# EAGLE board EMG_Shield_v.1.2 (EAGLE 6.2)
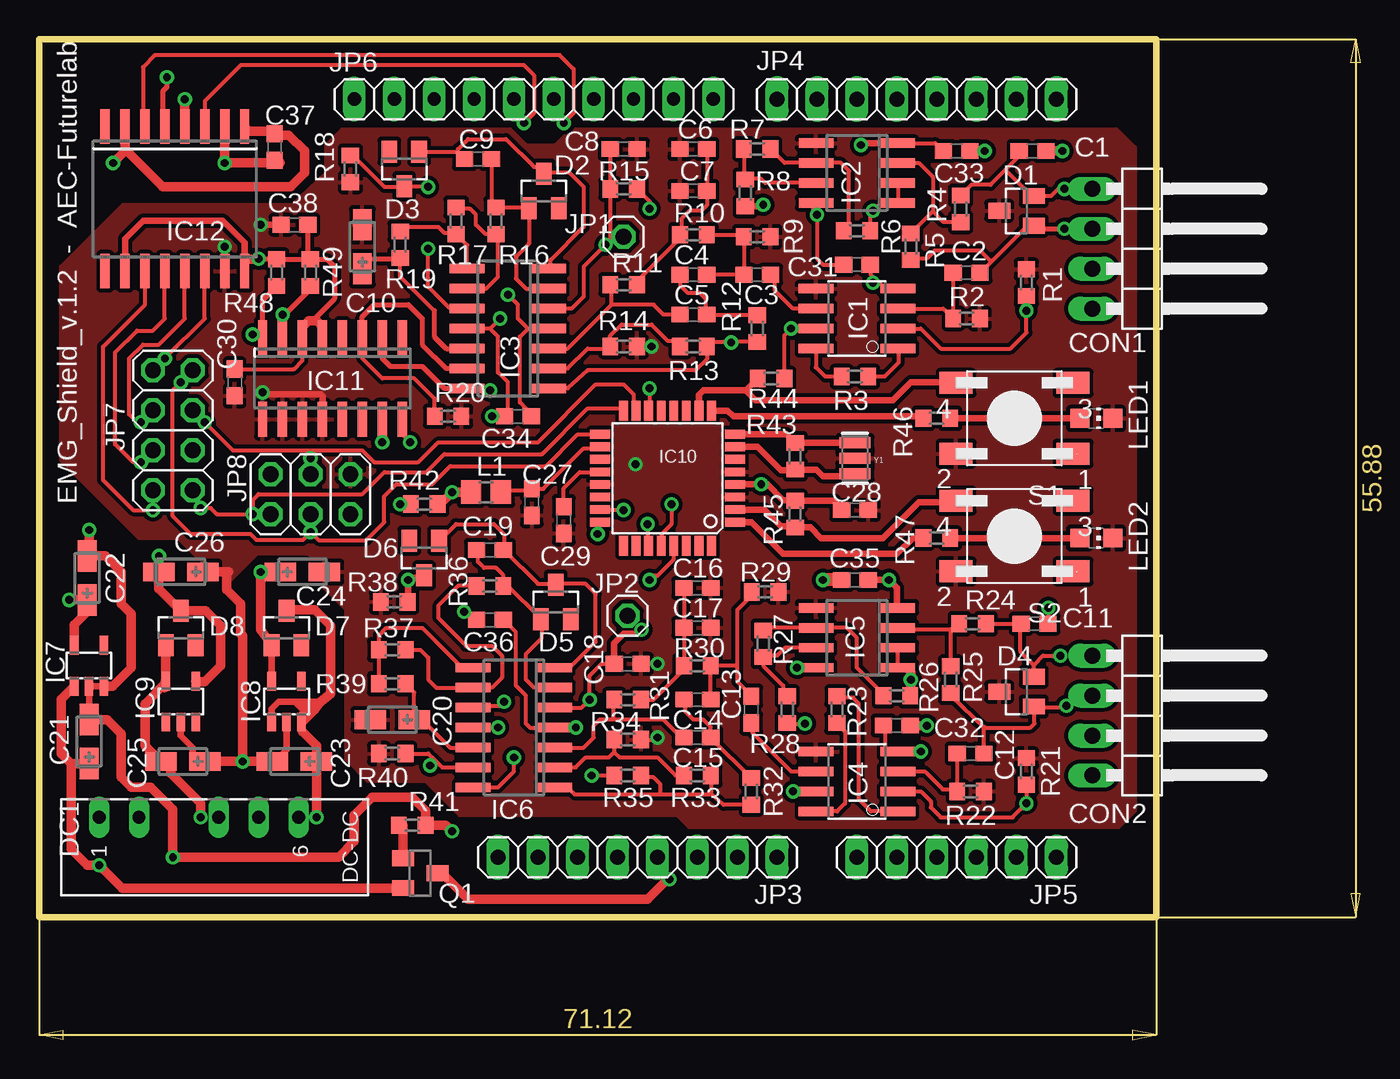
[diagram p0: board, top side]
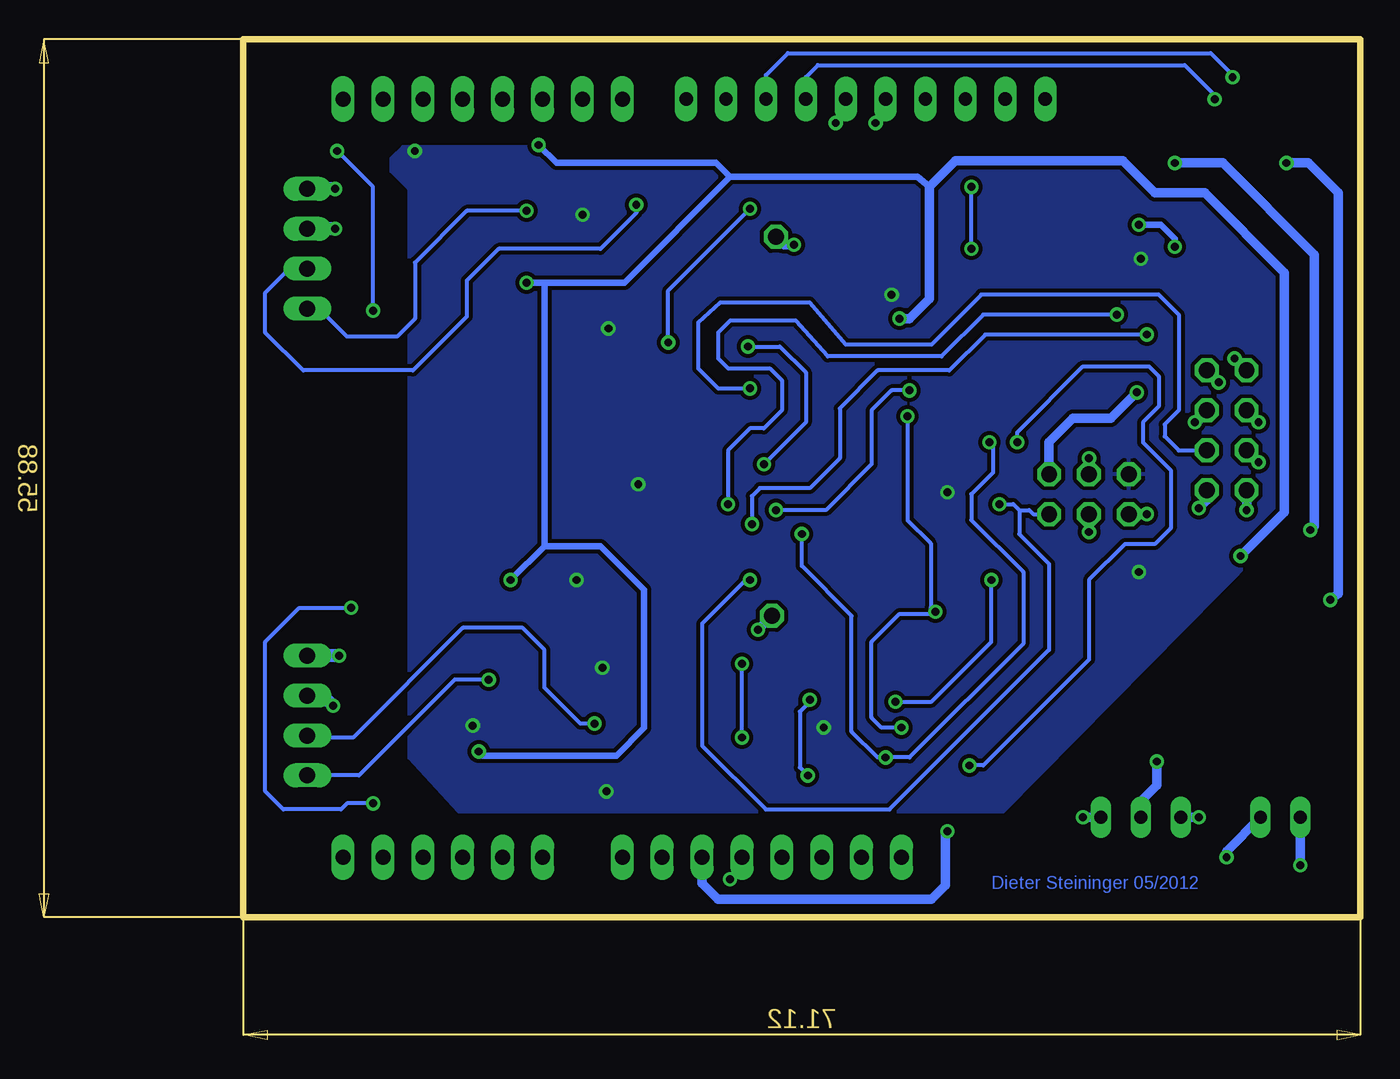
[diagram p1: board, bottom side, seen from below]

Size 71.12 x 55.88 mm. Coordinates in mm from the lower left corner, seen from the top.
Outline: 0,0 0,55.88 71.12,55.88 71.12,0 0,0
Copper layers (1*16): Top 0.035mm / dielectric 1.5mm / Bottom 0.035mm
Design rules: minimum track width 10mil, minimum drill 24mil, track to track 10mil, track to pad 10mil, pad to pad 10mil, via to via 10mil, smd to smd 8mil, copper to edge 40mil, drill to drill 8mil, minimum pad ring 10mil, minimum via ring 8mil, stop-mask expansion 4mil, vias tented up to drill 0mil, thermal gap 10mil

## Footprints (pad centres in the part's own frame; a part is rotated, then mirrored left to right if it is on the bottom)
C0603 = smd 1.1 x 1: 1 -0.85,0; 2 0.85,0
CT3216 = smd 2 x 1.2: + -1.4,0; - 1.4,0
1X04/90 = drill 1.016 long: 1 -3.81,-3.81; 2 -1.27,-3.81; 3 1.27,-3.81; 4 3.81,-3.81
SOT23 = smd 1 x 1.4: 1 -0.95,-1.1; 2 0.95,-1.1; 3 0,1.1
NMA = drill 0.813 long: 1 0,6.35; 2 0,3.81; 4 0,-1.27; 5 0,-3.81; 6 0,-6.35
SO08 = smd 0.61 x 2.21: 1 -1.905,-2.616; 2 -0.635,-2.616; 3 0.635,-2.616; 4 1.905,-2.616; 5 1.905,2.616; 6 0.635,2.616; 7 -0.635,2.616; 8 -1.905,2.616
SO08' = smd 0.6 x 2.2: 1 -1.905,-2.6; 2 -0.635,-2.6; 3 0.635,-2.6; 4 1.905,-2.6; 5 1.905,2.6; 6 0.635,2.6; 7 -0.635,2.6; 8 -1.905,2.6
SO14 = smd 0.6 x 2.2: 1 -3.81,-2.6; 2 -2.54,-2.6; 3 -1.27,-2.6; 4 0,-2.6; 5 1.27,-2.6; 6 2.54,-2.6; 7 3.81,-2.6; 8 3.81,2.6; 9 2.54,2.6; 10 1.27,2.6; 11 0,2.6; 12 -1.27,2.6; 13 -2.54,2.6; 14 -3.81,2.6
SOT23-DBV = smd 0.55 x 1.2: 1 -0.95,-1.3; 2 0,-1.3; 3 0.95,-1.3; 4 0.95,1.3; 5 -0.95,1.3
SOT23-5 = smd 0.55 x 1.2: 1 -0.95,-1.3; 2 0,-1.3; 3 0.95,-1.3; 4 0.95,1.3; 5 -0.95,1.3
TQFP32-08 = smd 1.27 x 0.559: 1 -4.293,2.8; 2 -4.293,2; 3 -4.293,1.2; 4 -4.293,0.4; 5 -4.293,-0.4; 6 -4.293,-1.2; 7 -4.293,-2; 8 -4.293,-2.8; 17 4.293,-2.8; 18 4.293,-2; 19 4.293,-1.2; 20 4.293,-0.4; 21 4.293,0.4; 22 4.293,1.2; 23 4.293,2; 24 4.293,2.8 | smd 0.559 x 1.27: 9 -2.8,-4.293; 10 -2,-4.293; 11 -1.2,-4.293; 12 -0.4,-4.293; 13 0.4,-4.293; 14 1.2,-4.293; 15 2,-4.293; 16 2.8,-4.293; 25 2.8,4.293; 26 2,4.293; 27 1.2,4.293; 28 0.4,4.293; 29 -0.4,4.293; 30 -1.2,4.293; 31 -2,4.293; 32 -2.8,4.293
SOIC16N = smd 0.6 x 2.2: 1 -4.445,-2.6; 2 -3.175,-2.6; 3 -1.905,-2.6; 4 -0.635,-2.6; 5 0.635,-2.6; 6 1.905,-2.6; 7 3.175,-2.6; 8 4.445,-2.6; 9 4.445,2.6; 10 3.175,2.6; 11 1.905,2.6; 12 0.635,2.6; 13 -0.635,2.6; 14 -1.905,2.6; 15 -3.175,2.6; 16 -4.445,2.6
SO-16DW = smd 0.6 x 2.2: 1 -4.445,-4.6; 2 -3.175,-4.6; 3 -1.905,-4.6; 4 -0.635,-4.6; 5 0.635,-4.6; 6 1.905,-4.6; 7 3.175,-4.6; 8 4.445,-4.6; 9 4.445,4.6; 10 3.175,4.6; 11 1.905,4.6; 12 0.635,4.6; 13 -0.635,4.6; 14 -1.905,4.6; 15 -3.175,4.6; 16 -4.445,4.6
1X01 = drill 1.016 octagon: 1 0,0
SMARTPRJ_1X08-TH = drill 0.95 pad 1.422 long: 1 -8.89,0; 2 -6.35,0; 3 -3.81,0; 4 -1.27,0; 5 1.27,0; 6 3.81,0; 7 6.35,0; 8 8.89,0
SMARTPRJ_1X06-TH = drill 0.95 pad 1.422 long: 1 -6.35,0; 2 -3.81,0; 3 -1.27,0; 4 1.27,0; 5 3.81,0; 6 6.35,0
SMARTPRJ_1X10 = drill 0.85 pad 1.422 long: 1 -11.43,0; 2 -8.89,0; 3 -6.35,0; 4 -3.81,0; 5 -1.27,0; 6 1.27,0; 7 3.81,0; 8 6.35,0; 9 8.89,0; 10 11.43,0
2X04 = drill 1.016 octagon: 1 -3.81,-1.27; 2 -3.81,1.27; 3 -1.27,-1.27; 4 -1.27,1.27; 5 1.27,-1.27; 6 1.27,1.27; 7 3.81,-1.27; 8 3.81,1.27
2X03 = drill 1.016 octagon: 1 -2.54,-1.27; 2 -2.54,1.27; 3 0,-1.27; 4 0,1.27; 5 2.54,-1.27; 6 2.54,1.27
R0805 = smd 1.3 x 1.5: 1 -0.95,0; 2 0.95,0
CHIP-LED0805 = smd 1.2 x 1.2: A 0,-1.05; C 0,1.05
R0603 = smd 1 x 1.1: 1 -0.85,0; 2 0.85,0
TASTER-9314_SMD = smd 2.1 x 1.4: 1 -3.73,2.25; 2 3.73,2.25; 3 -3.73,-2.25; 4 3.73,-2.25
SMARTPRJ_RESONATOR = smd 0.7 x 2: 1 -1,0; 2 0,0; 3 1,0

## Placement (x,y rotation side)
C1  68nF  [C0603]  63.25,48.77 0 top
C2  68nF  [C0603]  59.05,41.02 180 top
C3  68nF  [C0603]  45.72,40.89 180 top
C4  150nF  [C0603]  41.66,40.89 180 top
C5  150nF  [C0603]  41.66,38.35 180 top
C6  150nF  [C0603]  41.66,48.9 0 top
C7  150nF  [C0603]  41.66,46.23 0 top
C8  68nF  [C0603]  37.21,48.9 180 top
C9  47pF  [C0603]  27.94,48.26 180 top
C10  4,7µF  [CT3216]  20.57,42.67 90 top
C11  68nF  [C0603]  63.37,18.67 0 top
C12  68nF  [C0603]  59.31,10.41 180 top
C13  68nF  [C0603]  45.34,13.21 90 top
C14  150nF  [C0603]  41.91,13.84 180 top
C15  150nF  [C0603]  41.91,11.43 180 top
C16  150nF  [C0603]  41.91,20.95 180 top
C17  150nF  [C0603]  41.91,18.41 180 top
C18  68nF  [C0603]  37.47,16.13 180 top
C19  47pF  [C0603]  28.7,23.37 0 top
C20  4,7µF  [CT3216]  22.48,12.57 180 top
C21  1µF  [CT3216]  3.17,11.18 90 top
C22  4,7µF  [CT3216]  3.05,21.59 90 top
C23  1µF  [CT3216]  16.26,9.91 180 top
C24  2,2µF  [CT3216]  16.76,21.97 0 top
C25  1µF  [CT3216]  9.14,9.91 180 top
C26  2,2µF  [CT3216]  9.02,21.97 180 top
C27  100nF  [C0603]  31.37,26.42 270 top
C28  100nF  [C0603]  51.94,25.91 0 top
C29  100nF  [C0603]  33.4,25.27 270 top
C30  100nF  [C0603]  12.45,34.04 270 top
C31  100nF  [C0603]  52.07,41.53 0 top
C32  100nF  [C0603]  54.61,12.19 180 top
C33  100nF  [C0603]  58.42,48.77 180 top
C34  100nF  [C0603]  30.48,31.88 180 top
C35  100nF  [C0603]  51.94,21.46 0 top
C36  100nF  [C0603]  28.7,18.92 180 top
C37  100nF  [C0603]  14.99,49.02 270 top
C38  100nF  [C0603]  16.26,44.07 180 top
CON1  Anschlusssockel  [1X04/90]  70.87,42.55 270 top
CON2  Anschlusssockel  [1X04/90]  70.87,12.83 270 top
D1  PESD24VL2BT,215  [SOT23]  62.23,44.96 90 top
D2  BAT54  [SOT23]  32.13,46.23 0 top
D3  BAT54  [SOT23]  23.24,47.62 180 top
D4  PESD24VL2BT,215  [SOT23]  62.23,14.35 90 top
D5  BAT54  [SOT23]  32.89,20.07 0 top
D6  BAT54  [SOT23]  24.51,22.86 180 top
D7  BAT54  [SOT23]  15.75,18.41 0 top
D8  BAT54  [SOT23]  9.02,18.41 0 top
DC1  MEA1D0505SC  [NMA]  10.16,6.35 90 top
IC1  INA118U  [SO08]  52.07,38.1 90 top
IC2  TLV272CDRG4  [SO08']  52.07,47.37 90 top
IC3  TLV274IDG4  [SO14]  29.84,37.47 90 top
IC4  INA118U  [SO08]  52.07,8.64 90 top
IC5  TLV272CDRG4  [SO08']  52.07,17.78 90 top
IC6  TLV274IDG4  [SO14]  30.23,12.06 90 top
IC7  TPS77033DBVRG4  [SOT23-DBV]  3.17,16 0 top
IC8  MIC5235  [SOT23-5]  15.75,13.72 0 top
IC9  MIC5270  [SOT23-5]  9.02,13.72 0 top
IC10  ATMEGA328P-AU  [TQFP32-08]  40.01,27.94 180 top
IC11  AD5242BRZ1M  [SOIC16N]  18.67,34.29 180 top
IC12  ISO7241  [SO-16DW]  8.64,45.72 180 top
JP1  Lötstift  [1X01]  37.21,43.31 0 top
JP2  Lötstift  [1X01]  37.47,19.18 0 top
JP3  Buchsenleiste  [SMARTPRJ_1X08-TH]  38.1,3.81 0 top
JP4  Buchsenleiste  [SMARTPRJ_1X08-TH]  55.88,52.07 0 top
JP5  Buchsenleiste  [SMARTPRJ_1X06-TH]  58.42,3.81 0 top
JP6  Buchsenleiste  [SMARTPRJ_1X10]  31.5,52.07 180 top
JP7  Trennleiste  [2X04]  8.51,30.99 270 top
JP8  Stiftleiste  [2X03]  17.27,26.92 0 top
L1  10µH  [R0805]  28.45,27.05 0 top
LED1  rot  [CHIP-LED0805]  67.31,31.75 270 top
LED2  rot  [CHIP-LED0805]  67.31,24.13 270 top
Q1  ZXMP3A13FTA  [SOT23]  24.26,2.79 270 top
R1  51k  [R0603]  62.87,40.39 270 top
R2  51k  [R0603]  59.05,38.1 0 top
R3  47R  [R0603]  51.94,34.42 180 top
R4  100k  [R0603]  58.67,45.09 90 top
R5  100k  [R0603]  55.5,42.67 270 top
R6  10k  [R0603]  52.07,43.69 180 top
R7  390k  [R0603]  45.72,48.9 180 top
R8  390k  [R0603]  44.96,46.1 270 top
R9  51k  [R0603]  45.72,43.31 180 top
R10  21k  [R0603]  41.66,43.43 0 top
R11  21k  [R0603]  37.21,40.26 0 top
R12  11k  [R0603]  45.72,37.47 90 top
R13  82k  [R0603]  41.66,36.32 180 top
R14  100k  [R0603]  37.21,36.32 0 top
R15  8k2  [R0603]  37.21,46.35 180 top
R16  27k  [R0603]  29.08,44.32 270 top
R17  27k  [R0603]  26.54,44.32 270 top
R18  27k  [R0603]  19.81,47.62 90 top
R19  47k  [R0603]  22.99,42.8 90 top
R20  6k8  [R0603]  26.04,31.88 0 top
R21  51k  [R0603]  62.87,9.27 270 top
R22  51k  [R0603]  59.31,8 0 top
R23  47R  [R0603]  50.8,13.21 270 top
R24  100k  [R0603]  59.44,18.67 0 top
R25  100k  [R0603]  58.04,15.11 270 top
R26  10k  [R0603]  54.61,14.1 180 top
R27  390k  [R0603]  46.1,17.4 270 top
R28  390k  [R0603]  47.62,13.21 270 top
R29  51k  [R0603]  46.23,20.7 180 top
R30  21k  [R0603]  41.91,16 0 top
R31  21k  [R0603]  37.47,13.84 0 top
R32  11k  [R0603]  45.34,8 90 top
R33  82k  [R0603]  41.91,9.02 180 top
R34  100k  [R0603]  37.47,11.3 0 top
R35  8k2  [R0603]  37.47,9.02 180 top
R36  27k  [R0603]  28.7,21.08 180 top
R37  27k  [R0603]  22.48,17.02 180 top
R38  27k  [R0603]  22.61,20.07 0 top
R39  47k  [R0603]  22.48,14.86 180 top
R40  6k8  [R0603]  22.48,10.41 180 top
R41  1k  [R0603]  23.75,5.84 0 top
R42  10k  [R0603]  24.51,26.29 0 top
R43  1M  [R0603]  48.13,29.34 90 top
R44  10k  [R0603]  46.61,34.29 0 top
R45  10k  [R0603]  48.13,25.65 90 top
R46  470R  [R0603]  57.15,31.75 180 top
R47  470R  [R0603]  57.15,24.13 180 top
R48  10k  [R0603]  15.11,41.02 270 top
R49  10k  [R0603]  17.27,41.02 270 top
S1  [TASTER-9314_SMD]  62.1,31.75 180 top
S2  [TASTER-9314_SMD]  62.1,24.26 180 top
Y1  CSTCE8M00G55-R0  [SMARTPRJ_RESONATOR]  51.94,29.21 90 top

## Library data of the parts
C1-C8 C10-C18 C20-C26 L1 = rcl
C9 C19 C27-C38 R1-R49 = resistor
CON1 CON2 JP1 JP2 JP7 JP8 = pinhead
D1-D8 = diode
DC1 = dc-dc-converter; MF: C & D TECHNOLOGIES, INC; MPN: NMA0515SC; OC_FARNELL: 1021434; OC_NEWARK: 61K3064
IC1 IC4 = burr-brown; MF: TEXAS INSTRUMENTS; MPN: INA118U; OC_FARNELL: 1212404; OC_NEWARK: 04M6168
IC2 IC3 IC5 IC6 = linear
IC7 = texas; MF: TEXAS INSTRUMENTS; MPN: TPS77033DBVT; OC_FARNELL: 8461570; OC_NEWARK: 77C1187
IC8 IC9 = v-reg-micrel
IC10 = atmega8
IC11 = analog-devices
IC12 = texas; MPN: ISO7241CDW; OC_FARNELL: 1575372; OC_NEWARK: 73M3155
JP3-JP6 Y1 = arduino_Uno_Rev3-02-TH
LED1 LED2 = led
Q1 = transistor-small-signal
S1 S2 = Ergaenzung

## Nets
+3V3: C22.+ C37.1 IC7.5 IC12.1 IC12.7
+5V: C24.+ C28.1 C30.1 C31.1 C32.1 C33.1 C34.1 C35.1 C36.1 C38.1 D7.1 IC1.7 IC2.8 IC3.4 IC4.7 IC5.8 IC6.4 IC8.5 IC10.4 IC11.5 IC11.6 IC12.10 IC12.16 JP8.2 L1.1 R42.2 R44.2 R45.2 R48.1 R49.1
-5V: C26.- C31.2 C32.2 C33.2 C34.2 C35.2 C36.2 D8.3 IC1.4 IC2.4 IC3.11 IC4.4 IC5.4 IC6.11 IC9.4
AGND: C21.- C22.- C37.2 DC1.2 IC7.2 IC7.3 IC12.2 JP3.6 R41.2
DIGI-POT-1-A: IC3.14 IC10.23 IC11.2
DIGI-POT-1-W: IC3.13 IC11.3 R20.1
DIGI-POT-2-A: IC6.14 IC10.24 IC11.16
DIGI-POT-2-W: IC6.13 IC11.15 R40.1
GND: C6.1 C7.1 C8.1 C10.- C16.1 C17.1 C18.1 C20.- C23.- C24.- C25.+ C26.+ C27.2 C28.2 C29.2 C30.2 C38.2 D1.3 D4.3 DC1.5 IC1.5 IC2.5 IC4.5 IC5.5 IC8.2 IC9.2 IC10.3 IC10.5 IC10.21 IC11.9 IC11.10 IC11.11 IC11.12 IC12.15 JP8.6 LED1.C LED2.C R1.1 R2.2 R9.1 R14.2 R18.1 R20.2 R21.1 R22.2 R29.1 R34.2 R38.1 R40.2 S1.2 S2.2 Y1.2
GND1: IC12.8
GND2: IC12.9
N$1: C1.1 CON1.1 D1.2 R4.2
N$2: IC1.1 R3.1
N$3: C1.2 IC1.2 R1.2
N$4: CON1.4 IC2.1 IC2.2 R6.1
N$5: C2.2 IC1.3 R2.1
N$6: C2.1 CON1.2 D1.1 R5.2
N$7: IC2.6 R6.2 R7.1
N$8: IC2.3 R4.1 R5.1
N$9: IC2.7 R7.2 R8.1
N$10: CON1.3 R8.2
N$11: IC4.1 R23.1
N$12: IC10.14 JP7.6
N$13: IC1.8 R3.2
N$14: C11.1 CON2.1 D4.2 R24.2
N$15: C3.1 IC1.6
N$16: C3.2 C4.1 R9.2 R10.2
N$17: IC3.1 R12.1 R13.1 R15.1
N$18: C4.2 C5.1 R12.2
N$19: C5.2 IC3.3 R11.1
N$20: C6.2 C7.2 R10.1 R11.2
N$21: IC3.2 R13.2 R14.1
N$22: C11.2 IC4.2 R21.2
N$23: C8.2 IC3.5 JP1.1 R15.2
N$24: C9.2 D2.3 D3.1 IC3.7
N$25: D3.3 IC3.10 R18.2
N$26: C9.1 D2.1 IC3.6 R16.1
N$27: IC3.9 R16.2 R17.1
N$28: IC3.8 R17.2 R19.2
N$29: C10.+ IC3.12 R19.1
N$30: C21.+ DC1.1 IC7.1 Q1.2
N$31: C12.2 IC4.3 R22.1
N$32: C12.1 CON2.2 D4.1 R25.2
N$33: IC5.3 R24.1 R25.1
N$34: CON2.4 IC5.1 IC5.2 R26.1
N$35: IC5.6 R26.2 R27.1
N$36: IC5.7 R27.2 R28.1
N$37: CON2.3 R28.2
N$38: IC12.14 JP7.1
N$39: IC12.4 JP6.4
N$40: IC4.8 R23.2
N$41: IC12.13 JP7.3
N$42: C13.1 IC4.6
N$43: C13.2 C14.1 R29.2 R30.2
N$44: C14.2 C15.1 R32.2
N$45: C15.2 IC6.3 R31.1
N$46: C16.2 C17.2 R30.1 R31.2
N$47: IC6.1 R32.1 R33.1 R35.1
N$48: IC6.2 R33.2 R34.1
N$49: C18.2 IC6.5 JP2.1 R35.2
N$50: C19.2 D5.3 D6.1 IC6.7
N$51: D6.3 IC6.10 R38.2
N$52: C19.1 D5.1 IC6.6 R36.1
N$53: IC6.9 R36.2 R37.1
N$54: IC6.8 R37.2 R39.2
N$55: C20.+ IC6.12 R39.1
N$56: C23.+ D7.3 DC1.6 IC8.1 IC8.3
N$57: JP3.5 Q1.3
N$58: IC10.9 R46.2
N$59: C25.- D8.1 DC1.4 IC9.5
N$60: IC10.10 R44.1 S1.4
N$61: Q1.1 R41.1
N$62: IC10.2 R45.1 S2.4
N$63: LED1.A R46.1
N$64: IC10.1 R47.2
N$65: LED2.A R47.1
N$66: IC12.6 JP6.5
N$67: IC10.17 JP7.2 JP8.3
N$68: IC10.15 JP7.4 JP8.4
N$69: IC12.12 JP7.5
N$70: IC10.16 JP7.8 JP8.1
N$71: IC12.3 JP6.6
N$72: IC12.5 JP6.3
N$73: IC12.11 JP7.7
N$74: C27.1 IC10.18 L1.2
N$75: IC10.7 R43.1 Y1.1
N$76: IC10.8 R43.2 Y1.3
N$83: C29.1 IC10.20
RESET: IC10.29 JP8.5 R42.1
SCL: IC10.28 IC11.7 R49.2
SDA: IC10.27 IC11.8 R48.2
VCC: IC10.6

## Tracks (layer width: path | path; a pad name or v marks a point on that pad's centre or on a via)
+3V3  (via drill 0.5 pad 0.25)
  Top 0.61: C22.+ 3.17,20.19 | 5.46,48.9 5.46,48.77 v4.7,48.01 | v1.91,20.19 3.17,20.19 C22.+ | IC12.7 5.46,48.9 | 5.46,48.9 7.87,46.48 16,46.48 16.89,47.37 16.89,48.77 15.88,49.78 15.58,49.78 C37.1 14.99,49.91 14.86,50.04 13.36,50.04 IC12.1 | IC7.5 2.23,18.61 3.05,19.43 C22.+
  Bottom 0.61: v4.7,48.01 3.3,48.01 1.4,46.1 1.4,20.57 v1.91,20.19
+5V  (via drill 0.5 pad 0.25, 0.5 pad 0.3)
  Top 0.254: IC6.4 31.24,12.06 30.99,12.32 30.99,14.1 30.35,14.73 30.35,18.12 C36.1 | R44.2 47.46,37.05 v47.88,37.47 | v49.53,44.7 49.53,41.91 49.91,41.53 C31.1 | 17.91,37.72 17.91,37.02 IC11.5 | 16.76,37.59 IC11.6 16.76,35.43 16.22,34.89 C30.1 | IC3.4 31.11,37.47 | 31.11,37.47 30.48,38.1 30.48,38.99 v29.84,39.62 | C34.1 31.08,31.92 31.08,32.3 30.61,32.77 30.61,36.96 31.11,37.47
  Top 0.305: C38.1 17.11,42.04 R49.1 | R49.1 R48.1 13.12,41.87 13.08,41.91 IC12.16 | R49.1 18.33,41.87 18.8,41.4 18.8,39.37 17.4,37.97 | 49.28,8 IC4.7
  Top 0.406: IC8.5 D7.1 | IC10.4 45.99,27.54 | C28.1 50.62,26.5 R45.2 48.09,26.54 47.37,26.54 46.37,27.54 45.99,27.54 | 45.99,27.54 v45.97,27.56 | v47.88,37.47 IC1.7 | IC12.10 5.46,43.18 6.6,44.32 11.68,44.32 13.08,42.93 13.08,41.91
  Top 0.61: IC6.4 v34.16,12.06 | IC5.8 v48.26,15.88 | C32.1 v56.52,12.19 | 49.28,8 v48.01,8 | IC2.8 49.47,44.76 v49.53,44.7 | C33.1 v60.2,48.77 | 16.76,37.59 17.14,37.97 17.4,37.97 17.65,37.97 17.91,37.72 | D7.1 14.8,17.33 14.1,18.29 v14.1,21.97 C24.+ | R42.2 25.53,26.29 v26.29,27.05 L1.1 | 13.12,41.87 13.93,41.87 v13.97,41.91
  Top 0.813: C35.1 v49.91,21.46
  pour Bottom: 4.32,41.27 12.32,49.02 60.96,49.02 61.72,48.26 61.72,47.5 60.58,46.35 60.58,10.16 57.4,6.73 22.73,6.73 4.32,25.4
-5V  (via drill 0.5 pad 0.25)
  Top 0.254: 54.69,10.72 IC4.4 54.69,10.67 53.85,10.67 53.85,12.1 C32.2 | IC2.4 57.06,49.28 C33.2 | IC1.4 53.85,40.01 53.21,40.64 | C31.2 52.96,41.49 52.96,40.89 53.21,40.64 | v28.83,31.88 C34.2 29.84,32.09 29.84,34.04 29.21,34.67 29.21,36.96 28.7,37.47 | 28.7,37.47 IC3.11 | 28.7,37.47 v29.34,38.1 | IC6.11 v29.21,12.06 | v27.05,19.43 27.34,19.43 C36.2 | 53.21,40.64 53.21,40.51 v53.09,40.39
  Top 0.406: IC2.4 52.45,49.28 v52.32,49.15 | v54.1,21.46 C35.2 | v54.1,21.46 54.61,20.95 54.61,19.81 | 54.61,19.81 54.61,19.75 IC5.4 54.67,19.75 54.61,19.81 | 53.98,21.59 v54.1,21.46 | v56.13,10.54 IC4.4
  Top 0.61: IC9.4 10,14.99 10.54,14.99 11.56,16 11.56,18.54 10.58,19.52 D8.3 7.62,20.91 C26.- v7.62,22.99
  Bottom 0.254: v29.21,12.06 30.48,12.06 31.11,12.7 31.11,17.53 29.34,19.3 27.18,19.3 v27.05,19.43 27.34,19.72 27.34,23.79 28.83,25.27 v28.83,31.88
  Bottom 0.406: 40.13,47.12 28.19,47.12 27.43,46.48 | v53.09,40.39 51.94,40.39 | 51.94,40.39 51.94,23.62 | v54.1,21.46 51.94,23.62 | 51.94,23.62 48.39,23.62 45.59,20.83 45.59,12.06 47.37,10.29 55.88,10.29 v56.13,10.54 | 40.13,47.12 41.02,48.01 51.18,48.01 v52.32,49.15 | 51.94,40.39 46.86,40.39 40.13,47.12
  Bottom 0.61: v29.34,38.1 28.7,38.1 27.43,39.37 27.43,46.48 25.78,48.13 15.11,48.13 13.08,46.1 9.91,46.1 4.83,41.02 4.83,25.78 v7.62,22.99
AGND  (via drill 0.5 pad 0.25)
  Top 0.406: C21.- IC7.2 IC7.3
  Top 0.61: C21.- 4.32,12.57 5.21,11.68 5.21,8.89 5.84,8.26 7.11,8.26 8.51,6.86 v8.51,3.81 19.05,3.81 20.07,4.83 20.07,6.48 21.21,7.62 23.75,7.62 24.6,6.77 R41.2 25.87,5.84 v26.29,5.46 | 3.3,22.99 3.18,22.99 C22.- | 3.3,22.99 4.19,22.99 5.21,21.97 5.21,19.94 5.84,19.3 5.84,15.88 4.67,14.7 IC7.3 | 3.3,22.99 3.17,23.11 v3.17,24.64 | IC12.2 v11.81,48.01 14.82,48.01 C37.2 15.33,48.01
  Bottom 0.61: v3.17,24.64 2.92,24.89 2.92,42.16 8.76,48.01 v11.81,48.01 | v8.51,3.81 8.51,4.19 DC1.2 | JP3.6 41.91,2.16 40.89,1.14 27.3,1.14 26.42,2.03 26.42,5.33 v26.29,5.46
DIGI-POT-1-A  (via drill 0.5 pad 0.25)
  Top 0.254: IC3.14 28.57,33.66 v28.7,33.53 | v37.21,25.91 35.74,25.91 IC10.23
  Top 0.305: IC11.2 21.84,35.56 22.35,35.05 24.38,35.05 25.78,33.66 IC3.14
  Bottom 0.254: v37.21,25.91 34.04,25.91 31.11,28.83 31.11,32.26 29.84,33.53 v28.7,33.53
DIGI-POT-1-W
  Top 0.254: R20.1 25.18,32.98 23.88,34.29 21.84,34.29 20.57,35.56 IC11.3
  Top 0.305: IC11.3 20.57,38.23 21.34,38.99 23.5,38.99 24.38,38.1 24.38,36.45 25.91,34.92 IC3.13
DIGI-POT-2-A  (via drill 0.5 pad 0.25)
  Top 0.254: IC6.14 29.21,8.26 30.23,9.27 v30.23,10.16 | v35.56,24.38 35.56,24.99 IC10.24 | v23.62,30.23 23.11,30.73 IC11.16
  Bottom 0.254: v35.56,24.38 35.56,22.35 32.38,19.18 32.38,11.81 30.73,10.16 v30.23,10.16 28.7,10.16 21.46,17.4 21.46,21.97 24.77,25.27 24.77,26.92 23.37,28.32 23.37,30.23 v23.62,30.23
DIGI-POT-2-W  (via drill 0.5 pad 0.25)
  Top 0.254: R40.1 24.77,10.41 25.15,10.03 | 25.15,10.03 25.65,9.53 27.56,9.53 | IC11.15 v21.84,30.23 | v24.89,9.65 25.15,9.91 25.15,10.03
  Top 0.305: 27.56,9.53 IC6.13
  Bottom 0.254: v21.84,30.23 21.84,30.86 17.65,35.05 13.46,35.05 12.83,34.42 12.83,32.51 13.84,31.5 13.84,30.23 12.06,28.45 12.06,24.77 13.08,23.75 14.99,23.75 17.27,21.46 17.27,16.38 24,9.65 v24.89,9.65
GND  (via drill 0.5, 0.5 pad 0.25)
  Top 0.254: R14.2 v38.99,36.32 | 35.73,27.56 IC10.21 | R34.2 39.24,11.3 v39.37,11.43 | v39.37,16.13 C18.1
  Top 0.406: IC11.12 18.03,33.15 17.91,33.27 14.35,33.27 v14.22,33.4 | 10.41,10.03 C25.+ 9.78,9.91 9.78,10.79 9.02,11.56 IC9.2 | C23.- 15.37,9.91 15.62,10.16 15.62,10.54 | 15.62,10.54 15.75,10.67 IC8.2 | 15.62,10.54 15.37,10.29 14.73,10.29 14.35,9.91 | C38.2 v14.1,44.07 | v11.81,42.67 IC12.15
  Top 0.61: v12.95,9.91 C25.+ | v12.95,9.91 14.35,9.91 C23.- | v12.95,9.91 12.95,17.91 12.83,18.03 12.83,19.94 11.94,20.83 11.94,21.84 12.06,21.97 C26.+
  Bottom 0.254: v38.99,36.32 36.96,36.32 35.31,34.67 35.31,31.5 v37.97,28.83 | v39.37,11.43 v39.37,16.13
  Bottom 0.406: v14.1,44.07 12.7,44.07 11.81,43.18 v11.81,42.67
  Bottom 0.61: JP8.6 19.81,30.23 18.29,31.75 15.88,31.75 v14.22,33.4 | DC1.5 13.97,7.37 12.95,8.38 v12.95,9.91
  pour Top: 12.06,21.34 11.68,21.34 8.89,24.13 6.35,24.13 1.4,29.08 1.4,41.4 5.33,45.34 16.13,45.34 18.29,47.37 18.29,49.15 19.3,50.16 29.97,50.16 30.99,49.15 32.89,49.15 33.91,50.16 68.58,50.16 70.74,48.01 70.74,7.75 68.71,5.71 41.4,5.71 40.64,6.48 26.8,6.48 24.64,8.64 20.95,8.64 19.56,10.03 19.56,19.56 18.16,20.95 18.16,22.1 17.14,23.11 13.84,23.11
N$1  (via drill 0.5 pad 0.25)
  Top 0.254: C1.1 62.4,48.43 61.53,47.56 | 61.53,47.56 60.58,46.61 59.35,46.61 R4.2 | 61.53,47.56 63.19,45.91 D1.2 64.45,45.91 64.9,46.35 v65.28,46.35
  Bottom 0.813: v65.28,46.35 CON1.1
N$2
  Top 0.254: R3.1 53.85,34.42 54.74,35.31 54.74,36.14
  Top 0.406: 54.74,36.14 IC1.1
N$3  (via drill 0.5 pad 0.25)
  Top 0.254: IC1.2 56.13,37.47 57.4,36.2 61.85,36.2 62.87,37.21 v62.87,38.61 R1.2
  Top 0.61: C1.2 v65.15,48.77
  Bottom 0.254: v62.87,38.61 62.87,46.48 v65.15,48.77
N$4  (via drill 0.5 pad 0.25)
  Top 0.254: IC2.2 IC2.1 | 53.72,45.34 54.54,45.34 IC2.1 | R6.1 52.92,44.79 v53.09,44.96 53.59,45.47 IC2.1
  Bottom 0.254: CON1.4 66.29,38.73 64.52,36.96 61.34,36.96 60.2,38.1 60.2,41.66 56.9,44.96 v53.09,44.96
N$5
  Top 0.254: IC1.3 57.57,38.73 R2.1 C2.2
N$6  (via drill 0.5 pad 0.25)
  Top 0.254: 60.71,41.78 62.74,43.81 63.14,43.81 D1.1 | C2.1 59.94,41.02 60.71,41.78 | 60.71,41.78 60.58,41.78 59.94,42.42 57.02,42.42 56.52,41.91 55.59,41.91 R5.2
  Top 0.305: D1.1 63.43,44.01 63.63,43.81 v65.28,43.81
  Bottom 0.813: v65.28,43.81 CON1.2
N$7
  Top 0.254: R6.2 51.22,43.85 51.56,44.2 51.56,47.5 51.05,48.01 IC2.6 47.46,48.01 R7.1
N$8
  Top 0.254: IC2.3 56.01,48.01 56.9,47.12 56.9,44.92 | 56.9,44.92 R5.1 | R4.1 57.58,44.23 56.9,44.92
N$9
  Top 0.254: R7.2 44.87,47.04 R8.1 45,46.99 45.97,46.99 46.23,46.74 IC2.7
N$10  (via drill 0.5 pad 0.25)
  Top 0.406: R8.2 46.01,45.25 v46.1,45.34
  Bottom 0.254: v46.1,45.34 46.1,44.83 48.39,42.55 54.86,42.55 56.9,40.51 56.9,38.23 60.33,34.8 67.31,34.8 69.72,37.21 69.72,39.75 68.2,41.27 CON1.3
N$11
  Top 0.254: IC4.1 52.96,6.73 52.2,7.49 52.2,13.59 51.82,13.97 51.14,13.97 R23.1
N$12  (via drill 0.5 pad 0.25)
  Top 0.254: v38.86,33.66 38.86,32.29 IC10.14
  Bottom 0.254: v38.86,33.66 40.89,33.66 42.16,34.92 42.16,37.85 40.77,39.12 35.05,39.12 32.77,36.45 27.3,36.45 24.13,39.62 12.83,39.62 11.56,38.35 11.56,32.26 12.45,31.37 12.45,30.61 11.56,29.72 JP7.6
N$13
  Top 0.254: IC1.8 49.45,35 50.04,34.42 R3.2
N$14  (via drill 0.5 pad 0.25)
  Top 0.254: D4.2 63.33,16.05 | 63.33,16.05 62.48,16.89 62.48,18.25 | 63.33,16.05 63.92,16.64 v65.02,16.64 | R24.2 C11.1
  Top 0.305: 62.48,18.25 C11.1
  Bottom 0.813: v65.02,16.64 CON2.1
N$15
  Top 0.254: IC1.6 48.01,38.73 46.86,39.88 46.86,40.6 C3.1
N$16
  Top 0.254: C4.1 C3.2 R9.2 44.74,43.43 R10.2
N$17  (via drill 0.5 pad 0.25)
  Top 0.254: R12.1 44.03,36.62 | IC3.1 33.66,33.66 34.92,34.8 41.78,34.8 42.51,35.52 R13.1 42.8,36.62 44.03,36.62 | 44.03,36.62 v44.07,36.58 | v38.86,45.09 38.86,45.55 R15.1
  Bottom 0.254: v44.07,36.58 44.07,39.88 v38.86,45.09
N$18
  Top 0.254: R12.2 45.68,38.35 C5.1 42.42,38.44 42.42,39.37 42.04,39.75 41.27,39.75 40.81,40.22 C4.2
N$19
  Top 0.254: IC3.3 33.66,36.2 36.45,38.99 | C5.2 39.75,38.35 39.12,38.99 36.45,38.99 | 36.45,38.99 36.45,39.75 36.36,39.84 R11.1
N$20
  Top 0.254: C6.2 C7.2 42.51,45.3 42.16,44.96 41.4,44.96 40.89,44.45 40.89,43.52 R10.1 40.81,43.22 38.35,40.77 38.35,40.55 R11.2
N$21
  Top 0.254: IC3.2 33.66,34.92 34.92,36.2 36.23,36.2 R14.1 36.36,37 37.08,37.72 38.99,37.72 40.01,36.7 40.42,36.7 R13.2
N$22  (via drill 0.5 pad 0.25)
  Top 0.254: IC4.2 56.13,8 56.77,7.37 56.77,6.99 57.4,6.35 61.98,6.35 v62.87,7.24 R21.2 | v64.26,19.68 64.26,18.71 C11.2
  Bottom 0.254: v62.87,7.24 64.52,7.24 64.9,6.86 68.58,6.86 69.72,8 69.72,17.53 67.56,19.68 v64.26,19.68
N$23  (via drill 0.5 pad 0.25)
  Top 0.254: C8.2 R15.2 36.36,43.09 v36.07,42.8 34.67,41.4 34.67,39.5 33.91,38.73 IC3.5
  Bottom 0.61: v36.07,42.8 36.7,42.8 JP1.1
N$24
  Top 0.254: D3.1 26.62,48.73 C9.2 27.05,48.26 26.67,48.64 26.67,48.9 27.3,49.53 29.72,49.53 31.5,47.75 31.71,47.75 D2.3 32.17,47.37 33.78,47.37 34.67,46.48 34.67,43.94 32.51,41.78 32.51,41.34 IC3.7
N$25  (via drill 0.5 pad 0.25)
  Top 0.254: R18.2 19.9,48.55 21.97,46.48 23.2,46.48 D3.3 23.28,46.48 v24.77,46.48 | IC3.10 26.16,38.73 24.77,40.13 v24.77,42.55
  Bottom 0.254: v24.77,42.55 v24.77,46.48
N$26
  Top 0.254: D2.1 31.18,42.87 30.35,42.04 30.35,40.64 30.99,40.01 IC3.6 | D2.1 31.18,45.27 30.86,45.59 | C9.1 28.79,45.47 R16.1 31.14,45.17 D2.1
N$27
  Top 0.254: IC3.9 28.45,40.01 29.21,40.77 29.21,43.35 R16.2 28.41,43.47 27.81,44.07 27.81,44.7 27.43,45.09 26.76,45.09 R17.1
N$28
  Top 0.254: R19.2 23.07,43.65 23.37,43.94 25.4,43.94 25.78,43.56 26.45,43.56 R17.2 27.25,42.77 IC3.8
N$29
  Top 0.254: 25.15,38.61 22.99,40.77 R19.1
  Top 0.305: 22.77,42.16 R19.1 22.95,41.91 20.83,41.91 20.57,41.66 C10.+ | 25.15,38.61 25.15,36.96 25.91,36.2 IC3.12
N$30  (via drill 0.5 pad 0.25)
  Top 0.61: C21.+ 2.04,9.78 | 2.04,9.78 1.4,10.41 1.4,13.87 IC7.1 | Q1.2 5.27,1.84 v3.81,3.3 3.05,3.3 2.03,4.32 2.03,9.77 2.04,9.78
  Bottom 0.61: v3.81,3.3 DC1.1
N$31
  Top 0.254: C12.2 R22.1 58.2,8.13 57.53,8.13 56.39,9.27 IC4.3
N$32  (via drill 0.5 pad 0.25)
  Top 0.254: 58.04,14.1 60.2,12.06 63.12,12.06 63.37,12.32 63.37,13.36 65.3,13.36 v65.41,13.46 | C12.1 60.16,12.03
  Top 0.305: R25.2 58.04,14.1 | 63.37,13.36 D4.1 | 60.16,12.03 60.2,12.06
  Bottom 0.813: v65.41,13.46 66.04,14.1 CON2.2
N$33
  Top 0.254: 54.8,18.29 58.04,18.29 R25.1
  Top 0.305: R24.1 58.04,18.29 | 54.8,18.29 IC5.3
N$34  (via drill 0.5 pad 0.25)
  Top 0.254: 54.67,15.81 IC5.1 54.67,17.09 54.61,17.14
  Top 0.305: IC5.2 54.61,17.14
  Top 0.61: IC5.1 55.24,15.88 55.5,15.62 v55.5,15.11 55.5,14.14 R26.1
  Bottom 0.254: v55.5,15.11 57.66,15.11 63.75,9.02 CON2.4
N$35
  Top 0.254: R26.2 53.76,14.19 52.07,15.88 52.07,17.78 51.44,18.41 IC5.6 46.14,18.41 R27.1
N$36
  Top 0.254: IC5.7 47.5,17.14 46.99,16.64 46.19,16.64 R27.2 46.1,16 47.37,14.73 47.37,14.31 R28.1
N$37  (via drill 0.5 pad 0.25)
  Top 0.254: R28.2 47.97,12.36 48.01,12.32 v48.77,12.32
  Bottom 0.254: v48.77,12.32 49.66,12.32 51.94,14.61 51.94,17.02 53.34,18.41 57.15,18.41 64.14,11.43 66.93,11.43 CON2.3
N$38  (via drill 0.5 pad 0.25)
  Top 0.254: IC12.14 10.54,38.1 v8,35.56
  Bottom 0.61: v8,35.56 JP7.1
N$39  (via drill 0.5 pad 0.25)
  Top 0.61: IC12.4 v9.27,52.07
  Bottom 0.254: JP6.4 35.31,53.47 34.54,54.23 11.18,54.23 9.27,52.32 v9.27,52.07
N$40
  Top 0.254: R23.2 51.31,11.81 51.31,7.24 50.8,6.73 49.53,6.73
  Top 0.305: 49.53,6.73 IC4.8
N$41  (via drill 0.5 pad 0.25)
  Top 0.254: IC12.13 9.27,38.1 7.62,36.45 6.6,36.45 5.71,35.56 5.71,32 6.22,31.5 v6.48,31.5
  Bottom 0.61: v6.48,31.5 JP7.3
N$42
  Top 0.254: IC4.6 47.88,9.27 45.43,11.72 45.43,12.27 C13.1
N$43
  Top 0.254: 44.45,16 R30.2 C14.1 | C13.2 45.34,14.1 44.45,14.99 44.45,16 | 44.45,16 44.45,19.56 45.34,20.45 45.34,20.66 R29.2
N$44
  Top 0.254: 45.72,8.64 R32.2 C15.1 42.76,12.1 42.29,12.57 41.66,12.57 41.15,13.08 41.15,13.63 C14.2
N$45
  Top 0.254: IC6.3 34.67,10.79 35.31,11.43 35.31,12.19 35.69,12.57 36.58,12.57 | C15.2 40.89,11.43 39.75,12.57 36.58,12.57 | 36.58,12.57 36.58,13.8 R31.1
N$46
  Top 0.254: R30.1 C17.2 C16.2 | R31.2 39.12,13.84 41.02,15.75
  Top 0.305: R30.1 41.06,15.79 41.02,15.75
N$47
  Top 0.254: IC6.1 33.66,8.26 34.1,7.81 39.56,7.81 | 39.56,7.81 39.56,8.45 39.12,8.89 38.48,8.89 38.35,9.02 | 39.56,7.81 42.8,7.81 | 42.8,7.81 42.8,9.02 | R32.1 43.59,7.15 42.8,7.81
  Top 0.305: 38.35,9.02 R35.1 | 42.8,9.02 R33.1
N$48
  Top 0.254: R34.1 36.62,10.5 | 36.62,10.5 36.96,10.16 39.37,10.16 40.51,9.02 R33.2 | IC6.2 34.16,9.53 34.8,10.16 36.27,10.16 36.62,10.5
  Top 0.305: 41.15,9.02 R33.2
N$49  (via drill 0.5 pad 0.25)
  Top 0.254: IC6.5 34.54,13.34 v35.05,13.84 35.05,15.37 35.81,16.13 C18.2 | v35.18,9.02 R35.2
  Top 0.406: C18.2 36.62,17.44 37.21,18.03 38.1,18.03 v38.35,18.29
  Bottom 0.254: v35.05,13.84 35.05,13.72 35.69,13.08 35.69,9.53 v35.18,9.02
  Bottom 0.61: v38.35,18.29 JP2.1
N$50
  Top 0.254: IC6.7 33.78,15.88 35.43,17.53 35.43,20.57 34.8,21.21 32.94,21.21 D5.3 32.85,21.21 31.75,21.21 29.59,23.37 C19.2 29.59,23.41 29.59,24.38 28.96,25.02 26.54,25.02 25.33,23.81 D6.1
N$51  (via drill 0.5 pad 0.25)
  Top 0.254: D6.3 24.51,21.59 | IC6.10 28.45,13.34 28.57,13.46 29.34,13.46 v29.59,13.72
  Top 0.406: 24.51,21.59 23.62,21.59 v23.5,21.46 23.5,20.11 R38.2
  Bottom 0.254: v29.59,13.72 27.3,13.72 23.5,17.53 v23.5,21.46
N$52
  Top 0.254: IC6.6 31.5,14.61 30.99,15.11 30.99,16.76 32,17.78 32,18.92 31.88,19.05 29.81,21.08 R36.1 29.55,21.76 29.08,22.23 28.32,22.23 27.94,22.61 27.94,23.37
  Top 0.305: C19.1 27.94,23.37 | D5.1 31.96,18.97 32,18.92
N$53
  Top 0.254: R37.1 24.26,17.02 24.77,16.51 24.77,15.11 25.27,14.61 IC6.9 28.83,14.61 29.46,15.24 29.46,16.64 28.83,17.27 27.18,17.27 25.4,19.05 25.4,19.81 26.67,21.08 R36.2
N$54
  Top 0.254: R37.2 R39.2 21.63,17.95 22.1,18.41 24.38,18.41 26.92,15.88 IC6.8
N$55
  Top 0.254: IC6.12 26.16,10.79 24.38,12.57 C20.+ 23.88,14.31 R39.1
N$56  (via drill 0.5 pad 0.25)
  Top 0.406: IC8.1 14.8,13.27 15.24,13.72 16.26,13.72 | 16.76,12.83 16.76,13.21 16.26,13.72 | 16.76,12.83 16.76,12.45 | 16.76,12.45 16.76,12.36 | 16.76,12.36 IC8.3 16.76,12.22 16.76,11.81 | 16.76,12.32 16.76,12.36 | 15.79,19.56 D7.3 | 17.53,13.21 17.02,13.46 16.76,12.83 | 16.76,12.45 16.89,12.45 17.53,13.08 | 16.26,13.72 17.91,13.72
  Top 0.61: 16.76,11.81 17.66,10.92 C23.+ 17.65,9.78 | 15.79,19.56 17.53,19.56 18.54,18.54 18.54,14.22 17.91,13.72 17.53,13.21 17.27,13.21 | 17.02,9.78 17.65,9.78 | 17.65,9.78 v17.65,6.35 | 17.02,13.46 16.76,13.46
  Bottom 0.61: v17.65,6.35 DC1.6
N$57  (via drill 0.5 pad 0.25)
  Top 0.61: Q1.3 25.53,2.92 27.3,1.14 38.73,1.14 40.01,2.41 v40.13,2.41
  Bottom 0.61: JP3.5 39.37,3.17 v40.13,2.41
N$58
  Top 0.406: IC10.9 43.84,32.23 44.2,31.88 56.17,31.88 R46.2
N$59  (via drill 0.5 pad 0.25)
  Top 0.406: 8.07,17.08 8.13,17.14
  Top 0.61: 8.07,14.93 6.73,13.59 6.73,10.92 C25.- 7.87,9.78 8.12,9.78 8.26,9.91 8.26,9.78 8.38,9.65 8.38,9.14 10.29,7.24 v10.29,6.35 | 8.07,14.93 IC9.5 | IC9.5 8,14.82 8,14.61 8.07,14.67 8.07,14.93 | IC9.5 D8.1 8.13,17.25 8.13,17.14
  Bottom 0.61: v10.29,6.35 DC1.4
N$60
  Top 0.254: 57.19,34.04 58.37,34.04 S1.4
  Top 0.406: IC10.10 42.01,33.24 42.29,33.53 44.96,33.53 | 44.96,33.53 45.59,32.89 54.36,32.89 55.5,34.04 57.19,34.04 | 44.96,33.53 45,33.53 R44.1
N$61
  Top 0.61: Q1.1 23.16,5.84 R41.1
N$62
  Top 0.254: 57.19,26.42 58.37,26.42 S2.4
  Top 0.406: IC10.2 46.2,25.94 47.24,24.89 48.05,24.89 R45.1 49.11,24.8 49.78,24.13 53.72,24.13 56.01,26.42 57.19,26.42
N$63
  Top 0.406: R46.1 LED1.A
N$64
  Top 0.406: IC10.1 45.34,25.14 47.37,23.11 54.61,23.11 55.63,24.13 R47.2
N$65
  Top 0.406: R47.1 LED2.A
N$66  (via drill 0.5 pad 0.25)
  Top 0.254: IC12.6 6.6,50.45 6.6,54.1 7.37,54.86 33.15,54.86 34.04,53.98 34.04,51.18 v33.4,50.55
  Bottom 0.406: v33.4,50.55 32.77,51.18 JP6.5
N$67  (via drill 0.5 pad 0.25)
  Top 0.254: IC10.17 34.29,30.73 32.26,28.7 26.16,28.7 25.02,27.56 22.73,27.56 21.97,26.8 21.97,25.15 20.83,24 17.78,24 v17.27,24.51 16.76,24 13.84,24 13.46,24.38 9.65,24.38 8.51,25.53 8.51,33.53 v9.02,34.04
  Bottom 0.406: JP8.3 v17.27,24.51
  Bottom 0.61: v9.02,34.04 JP7.2
N$68  (via drill 0.5 pad 0.25)
  Top 0.254: 17.27,29.72 20.57,29.72 21.34,28.96 24.13,28.96 25.4,30.23 31.75,30.23 35.43,33.91 37.21,33.91 37.85,33.27 37.85,32.39 IC10.15 37.97,32.27 | 17.27,29.72 12.32,29.72 v10.54,31.5 | 17.27,29.72 v17.27,29.21
  Bottom 0.61: v17.27,29.21 JP8.4 | v10.54,31.5 10.29,31.62 10.29,31.75 JP7.4
N$69  (via drill 0.5 pad 0.25)
  Top 0.254: IC12.12 8,38.1 7.24,37.34 6.22,37.34 4.83,35.94 4.83,30.1 5.97,28.96 v6.48,28.96
  Bottom 0.61: v6.48,28.96 JP7.5
N$70  (via drill 0.5 pad 0.25)
  Top 0.254: IC10.16 37.05,32.38 34.92,32.38 32,29.46 25.78,29.46 24.64,28.32 21.97,28.32 20.57,26.92 13.97,26.92 13.59,26.54 v13.59,25.65 11.3,25.65 10.92,26.04 v10.29,26.04
  Bottom 0.406: v13.59,25.65 JP8.1
  Bottom 0.61: v10.29,26.04 9.78,26.54 JP7.8
N$71  (via drill 0.5 pad 0.25)
  Top 0.254: IC12.3 10.54,51.94 12.83,54.23 30.86,54.23 31.5,53.59 31.5,51.18 v30.86,50.55
  Bottom 0.254: v30.86,50.55 30.23,51.18 JP6.6
N$72  (via drill 0.5 pad 0.25)
  Top 0.305: v8.13,53.47 8.13,52.83 7.87,52.58 7.87,50.45 IC12.5
  Bottom 0.254: JP6.3 37.85,53.59 36.45,54.99 9.53,54.99 8,53.47 v8.13,53.47
N$73  (via drill 0.5 pad 0.25)
  Top 0.254: IC12.11 6.73,38.99 4.06,36.32 4.06,27.81 5.97,25.91 v7.24,25.91
  Bottom 0.61: v7.24,25.91 JP7.7
N$74
  Top 0.254: 29.72,27.18 31.28,27.18 C27.1 32.09,27.27 34.67,29.84 35.62,29.84 IC10.18
  Top 0.61: L1.2 29.59,27.05 29.72,27.18
N$75
  Top 0.406: IC10.7 45.75,29.94 47.24,28.45 48.09,28.45 R43.1 49.49,28.49 49.91,28.07 51.8,28.07 Y1.1
N$76
  Top 0.406: IC10.8 47.58,30.74 R43.2 51.92,30.19 Y1.3
N$83
  Top 0.254: C29.1 33.4,27.3 34.42,28.32 35.69,28.32 IC10.20
RESET  (via drill 0.5 pad 0.25)
  Top 0.254: IC10.29 40.39,23.63 40.39,22.73 39.37,21.72 39.12,21.72 v38.86,21.46 | R42.1 v22.99,26.29
  Bottom 0.254: v22.99,26.29 22.1,26.29 21.72,25.91 | 21.72,25.91 21.72,24.38 19.81,22.48 19.81,17.02 29.97,6.86 37.85,6.86 41.91,10.92 41.91,18.67 39.12,21.46 v38.86,21.46 | 21.72,25.91 21.08,25.91 20.83,25.65 JP8.5
SCL  (via drill 0.5 pad 0.25)
  Top 0.254: 15.49,38.23 v15.49,38.35 | v40.26,26.29 40.26,25.02 39.62,24.38 39.62,23.67 IC10.28
  Top 0.305: R49.2 17.27,40.01 15.49,38.23 IC11.7
  Bottom 0.254: v15.49,38.35 24,38.35 26.67,35.69 33.91,35.69 35.94,37.97 40.13,37.97 40.89,37.21 40.89,35.56 40.26,34.92 37.59,34.92 36.83,34.16 36.83,32.26 37.97,31.11 38.86,31.11 40.26,29.72 v40.26,26.29
SDA  (via drill 0.5 pad 0.25)
  Top 0.254: IC11.8 13.78,36.89 v13.59,37.08 | v38.73,25.02 38.73,23.72 IC10.27
  Top 0.305: IC11.8 14.22,39.28 R48.2
  Bottom 0.254: v38.73,25.02 38.73,26.8 38.23,27.3 35.05,27.3 33.15,29.21 33.15,32.38 30.73,34.8 26.16,34.8 23.88,37.08 v13.59,37.08

## Text on the board
Bottom: Dieter Steininger 05/2012
tNames: EMG_Shield_v.1.2 - AEC-Futurelab